# Altium PCB shkb_lite.PcbDoc (part 1 of 2)
Units mm, origin at the board's own origin, x right, y up, seen from the top; angles counter-clockwise.
Board outline 141.5 x 36 mm, 2 copper layers (Top Layer, Bottom Layer), stack 1.57 mm thick; 74 components, 72 nets, 370 pads, 296 vias.
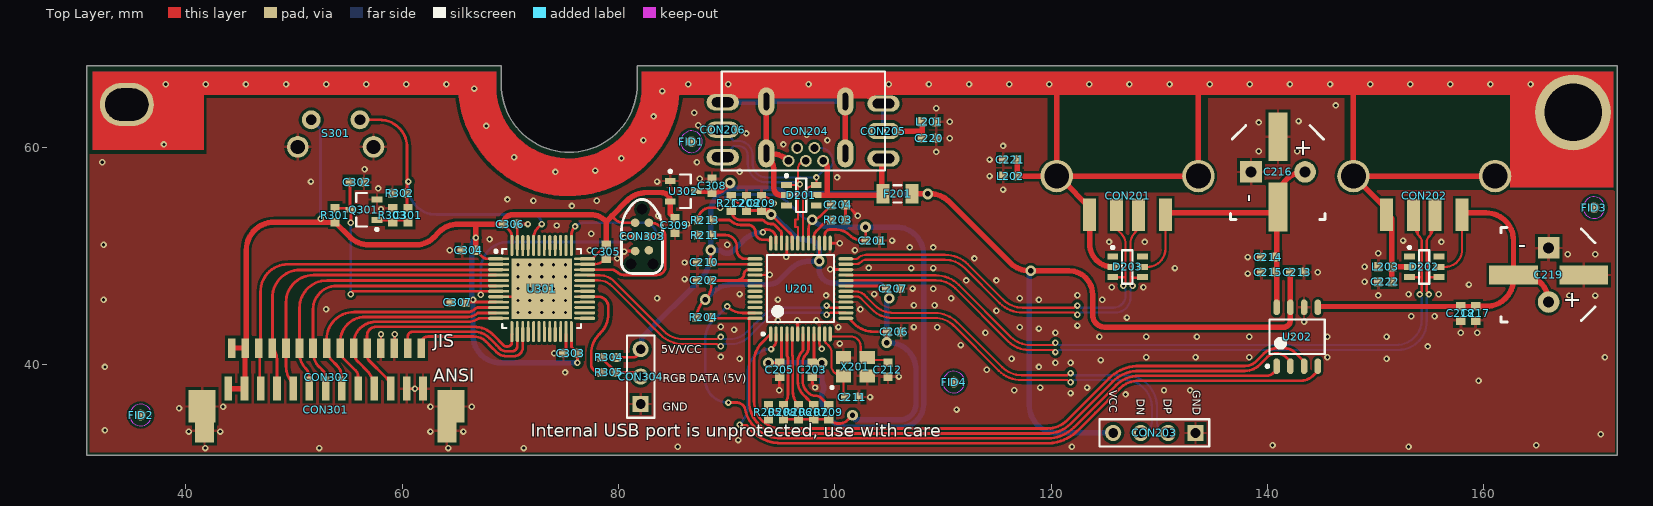
[diagram p0: Top Layer view]
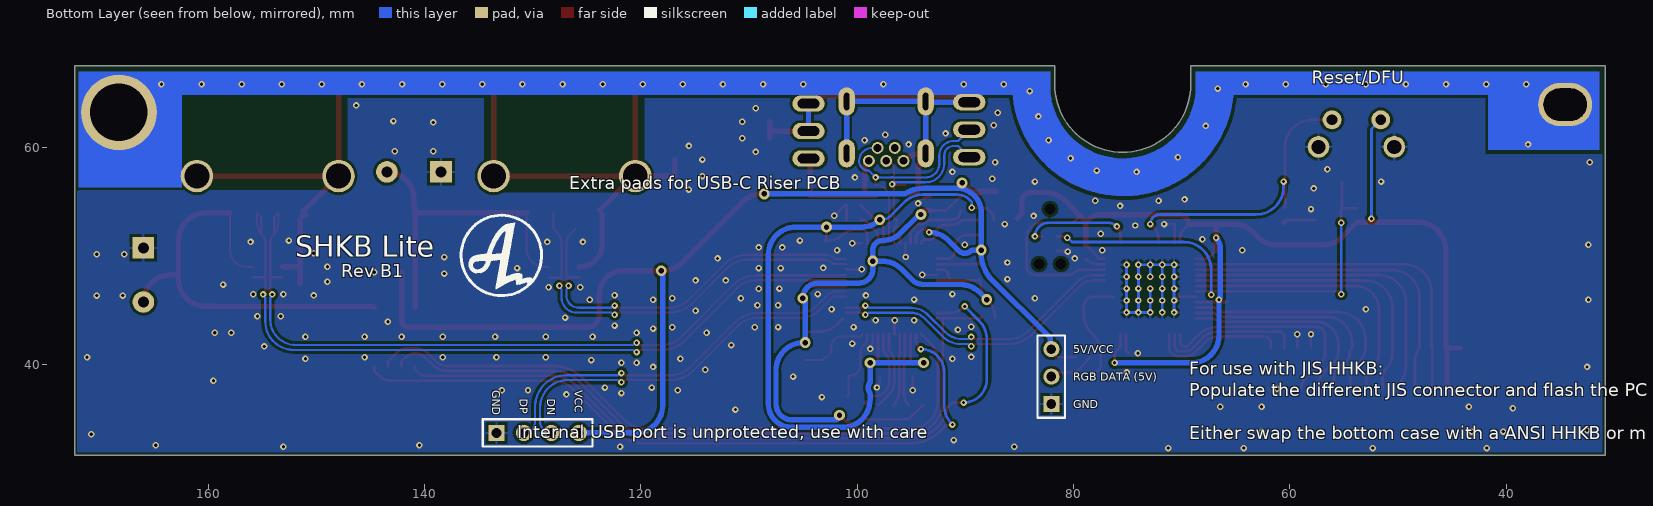
[diagram p1: Bottom Layer view, seen from below]

## Layer stack, top to bottom
Top Solder: solder mask 0.0102, Solder Resist, Dk 3.5
Top Layer: signal copper 0.0356
Dielectric 1: core 1.4986, Core-043, Dk 4.3
Bottom Layer: signal copper 0.0356
Bottom Solder: solder mask 0.0102, Solder Resist, Dk 3.5

## Board outline
30.843,31.602 30.843,67.602 69.143,67.602 69.143,65.902 ccw(c75.443,65.902) 75.443,59.602 ccw(c75.443,65.902) 81.743,65.902 81.743,67.602 172.344,67.602 172.344,31.602

## Design rules (kind name [scope] priority, off if disabled: settings)
BoardOutlineClearance [All] p1: gap=0.254 ignorepadtopadclearanceinfootprint=FALSE except(0: Arc-SplitContinuation Track-SplitContinuation SMDPad-SplitContinuation THPad-SplitContinuation Via-SplitContinuation Fill-SplitContinuation Poly-SplitContinuation Region-SplitContinuation Text-SplitContinuation)
Clearance [All] p1: gap=0.254 ignorepadtopadclearanceinfootprint=FALSE except(0: Arc-Hole Track-Hole SMDPad-Hole THPad-Hole Via-Hole Fill-Hole Poly-Hole Region-Hole Text-Hole; 0.2: Arc-Arc Arc-Track Arc-SMDPad Track-Track Track-SMDPad SMDPad-SMDPad)
DiffPairsRouting [All] p1: maxlimit=0.254 minlimit=0.254 mostfreqgap=0.254 toplayer_minwidth=0.2 toplayer_maxwidth=0.381 toplayer_prefwidth=0.381 bottomlayer_minwidth=0.2 bottomlayer_maxwidth=0.381 bottomlayer_prefwidth=0.381 maxuncoupledlength=12.7
PlaneConnect [All] p1: pad.planeconnectstyle=Relief pad.reliefexpansion=0.508 pad.reliefentries=4 pad.reliefconductorwidth=0.254 pad.reliefairgap=0.254 via.planeconnectstyle=Direct via.reliefexpansion=0.508 via.reliefentries=4 via.reliefconductorwidth=0.254 via.reliefairgap=0.254
PolygonConnect [All] p1: connectstyle=Relief reliefconductorwidth=0.254 reliefentries=4 polygonreliefangle="90 Angle" airgapwidth=0.254
RoutingVias [All] p1: holewidth=0.711 width=1.27 viastyle="Through Hole" minholewidth=0.3 minwidth=0.6 maxholewidth=0.711 maxwidth=1.27
SolderMaskExpansion [All] p1: expansion=0.102 istentingtop=FALSE
Width [All] p1: maxlimit=0.5 minlimit=0.2 preferedwidth=0.254
28 further rules are at their usual default settings.

## Classes and differential pairs
component class Designator: C301 C302 C303 C304 C305 C306 C307 C308 C309 CON301 CON302 CON303 CON304 Q301 R301 R302 R303 R304 R305 S301 U301 U302
differential pair D: +D_P -D_N
differential pair D4: +D4_P -D4_N
differential pair D3: +D3_P -D3_N
differential pair D2: +D2_P -D2_N
differential pair D1: +D1_P -D1_N

## Components (designator, comment, footprint, x,y, rotation, side; value= is the part's Value field where it differs from the comment)
C201 "" C0603[1608] 103.505,51.443 r180 top value=10uF
C202 "" C0603[1608] 87.925,47.76 r0 top value=10uF
C203 "" C0603[1608] 97.917,39.505 r90 top value=0.1uF
C204 "" C0603[1608] 100.33,54.745 r180 top value=0.1uF
C205 "" C0603[1608] 94.91,39.505 r90 top value=0.1uF
C206 "" C0603[1608] 105.48,43.017 r180 top value=0.1uF
C207 "" C0603[1608] 105.41,46.998 r180 top value=0.1uF
C208 "" C0603[1608] 91.821,54.872 r270 top value=0.1uF
C209 "" C0603[1608] 93.218,54.872 r270 top value=0.1uF
C210 "" C0603[1608] 87.925,49.411 r0 top value=1uF
C211 "" C0603[1608] 101.6,36.965 r180 top value=30pF
C212 "" C0603[1608] 104.902,39.505 r90 top value=30pF
C213 "" C0603[1608] 142.748,48.514 r180 top value=0.1uF
C214 "" C0603[1608] 140.081,49.911 r0 top value=0.1uF
C215 "" C0603[1608] 140.081,48.514 r0 top value=10uF
C216 "" "C_9L_9M + THT" 140.97,57.785 r270 top value=100-150uF
C217 "" C0603[1608] 159.258,44.704 r90 top value=0.1uF
C218 "" C0603[1608] 157.861,44.704 r90 top value=10uF
C219 "" "C_9L_9M + THT" 165.989,48.26 r180 top value=100-150uF
C220 "" C0603[1608] 108.712,60.893 r180 top value=0.1uF
C221 "" C0603[1608] 116.205,58.928 r0 top value=0.1uF
C222 "" C0603[1608] 150.876,47.625 r0 top value=0.1uF
C301 "" C0603[1608] 60.522,53.782 r270 top value=4.7uF
C302 "" C0603[1608] 55.823,56.83 r0 top value=470nF
C303 "" C0603[1608] 75.565,41.021 r0 top value=0.1uF
C304 "" C0603[1608] 66.167,50.546 r0 top value=0.1uF
C305 "" C0603[1608] 78.867,50.404 r90 top value=0.1uF
C306 "" C0603[1608] 69.977,52.959 r180 top value=0.1uF
C307 "" C0603[1608] 65.151,45.72 r0 top value=0.1uF
C308 "" C0603[1608] 88.646,56.515 r270 top value=1uF
C309 "" C0603[1608] 85.217,52.832 r90 top value=1uF
CON201 "Generic USB-A 2.0" "JING 903-231A2031S10100" 127.058,57.4 r180 top locked
CON202 "Generic USB-A 2.0" "JING 903-231A2031S10100" 154.493,57.4 r180 top locked
CON203 "Header 4" HDR1X4 125.73,33.655 r0 top
CON204 "HRO U-M-M5DD-W-2" "HRO U-M-M5DD-W-2" 97.315,59.5 r180 top
CON205 "Header 3" HDR1X3#1 104.492,59.022 r90 top
CON206 "Header 3" HDR1X3#1 89.633,59.149 r90 top
CON301 "HHKB-board connector" "JST S13B-ZR-SM4A-TF(LF)(SN)" 61.922,37.749 r180 top locked
CON302 "HHKB-board connector JP" DF14A-15P-1.25H 53.005,36.102 r180 top locked
CON303 "TC2030-IDC" TC2030-IDC-NL 82.169,51.816 r270 top
CON304 "Header 3" HDR1X3#2 82.042,36.322 r90 top
D201 "SRV05" SOT-23-6 96.901,55.634 r180 top locked
D202 "SRV05" SOT-23-6 154.493,49 r180 top
D203 "SRV05" SOT-23-6 127.058,49 r180 top
F201 "Fuse Thermal" C1206[3216] 105.791,55.753 r180 top
FID1 "Plug" Fiducial_Nordic 86.741,60.579 r90 top
FID2 "Plug" Fiducial_Nordic 35.814,35.306 r90 top
FID3 "Plug" Fiducial_Nordic 170.18,54.483 r90 top
FID4 "Plug" Fiducial_Nordic 110.998,38.354 r90 top
L201 "Inductor" L0603[1608] 108.712,62.417 r180 top value="220 @ 100MHz, 2A"
L202 "Inductor" L0603[1608] 116.205,57.404 r0 top value="220 @ 100MHz, 2A"
L203 "Inductor" L0603[1608] 150.876,49.022 r0 top value="220 @ 100MHz, 2A"
Q301 "2N7002 NMOS" SOT-23-3 56.458,54.29 r0 top
R203 "" R0603[1608] 100.33,53.348 r180 top value=2.7k
R204 "" R0603[1608] 87.884,44.331 r180 top value=10k
R205 "" R0603[1608] 93.853,35.568 r90 top value=10k
R206 "" R0603[1608] 96.647,35.568 r270 top value=10k
R207 "" R0603[1608] 98.044,35.568 r270 top value=10k
R208 "" R0603[1608] 95.25,35.568 r270 top value=10k
R209 "" R0603[1608] 99.441,35.568 r270 top value=10k
R211 "" R0603[1608] 88.011,51.951 r0 top value=10k
R212 "" R0603[1608] 90.424,54.872 r90 top value=10k
R213 "" R0603[1608] 88.011,53.34 r0 top value=10k
R301 "Res1" R0603[1608] 53.791,53.782 r90 top value=10K
R302 "Res1" R0603[1608] 59.76,55.814 r180 top value=10K
R303 "Res1" R0603[1608] 59.125,53.782 r90 top value=100K
R304 "Res1" R0603[1608] 79.121,40.64 r180 top value=10K
R305 "Res1" R0603[1608] 79.121,39.243 r180 top value=470
S301 "SW-PB" "WURTH 431256038736" 53.843,62.602 r180 top locked
U201 "FE1.1" "FE1.1 LQFP48" 96.815,46.998 r0 top
U202 "MIC2026-2" SOIC-8 142.748,42.545 r0 top
U301 "STM32F072/F303_LQFP48" "STM32 - COMBO 7X7MM" 72.894,46.998 r270 top locked
U302 "XC6206P332MR" SOT-23-3 85.979,56.007 r180 top
X201 "XTAL" XTAL-3225 101.895,39.759 r0 top value=12MHz

## Footprints (in the part's own frame and the unit in brackets; to place one, negate y for a bottom-side part, rotate by r counter-clockwise, add the part's x,y. Pads: shape width x height; smd on the part's side, far side on the other; paste and mask are expansions set on the pad)
C0603[1608] [mm] "Chip Resistor, 2-Leads, Body 1,57x0,80mm, IPC Medium Density"
  rect 0.8x0.85 smd: 1(-0.65,0) 2(0.65,0)
  body extent -0.83,-0.43 0.82,0.43, height 0.5
C1206[3216] [mm]
  rect 1.2x1.8 smd: 1(-1.35,0) 2(1.35,0)
  silkscreen extent -0.35,-0.8 0.35,0.8, body extent -1.6,-0.9 1.6,0.9, height 1.2
"C_9L_9M + THT" [mm] "Size 9L and 9M Aluminium capacitor"
  round 2 hole 1 mask+0.102: 1(0,2.5)
  rect 4.5x1.75 smd: 1(3.25,0) 2(-3.25,0)
  rect 2x2 hole 1 mask+0.102: 2(0,-2.5)
  silkscreen extent -4.29,-4.39 4.39,4.34, body extent -4.8,-4.26 4.8,4.24, height 6.5
DF14A-15P-1.25H [mm]
  rect 0.7x1.8 smd: 1(8.75,-5.4) 2(7.5,-5.4) 3(6.25,-5.4) 4(5,-5.4) 5(3.75,-5.4) 6(2.5,-5.4) 7(1.25,-5.4) 8(0,-5.4) 9(-1.25,-5.4) 10(-2.5,-5.4) 11(-3.75,-5.4) 12(-5,-5.4) 13(-6.25,-5.4) 14(-7.5,-5.4) 15(-8.75,-5.4)
  rect 2.5x3 smd: 16(-11.5,0) 16(11.5,0)
"FE1.1 LQFP48" [mm] "TSQFP, 48-Leads, Body 7.00x7.00mm, Pitch 0.50mm, IPC Medium Density"
  oval 0.3x1.4 smd: 1(-2.75,-4.2) 2(-2.25,-4.2) 3(-1.75,-4.2) 4(-1.25,-4.2) 5(-0.75,-4.2) 6(-0.25,-4.2) 7(0.25,-4.2) 8(0.75,-4.2) 9(1.25,-4.2) 10(1.75,-4.2) 11(2.25,-4.2) 12(2.75,-4.2) 25(2.75,4.2) 26(2.25,4.2) 27(1.75,4.2) 28(1.25,4.2) 29(0.75,4.2) 30(0.25,4.2) 31(-0.25,4.2) 32(-0.75,4.2) 33(-1.25,4.2) 34(-1.75,4.2) 35(-2.25,4.2) 36(-2.75,4.2)
  oval 1.4x0.3 smd: 13(4.2,-2.75) 14(4.2,-2.25) 15(4.2,-1.75) 16(4.2,-1.25) 17(4.2,-0.75) 18(4.2,-0.25) 19(4.2,0.25) 20(4.2,0.75) 21(4.2,1.25) 22(4.2,1.75) 23(4.2,2.25) 24(4.2,2.75) 37(-4.2,2.75) 38(-4.2,2.25) 39(-4.2,1.75) 40(-4.2,1.25) 41(-4.2,0.75) 42(-4.2,0.25) 43(-4.2,-0.25) 44(-4.2,-0.75) 45(-4.2,-1.25) 46(-4.2,-1.75) 47(-4.2,-2.25) 48(-4.2,-2.75)
  silkscreen extent -3.57,-4.32 3.1,3.1, body extent -4.5,-4.5 4.5,4.5, height 1.5
Fiducial_Nordic [mm]
  round 1 smd paste+0 mask+0.5: 0(0,0)
  Top Layer keep-out circle w0.01: c0,0 r1
HDR1X3#1 [mm] "Connector; Header; 3 Position"
  oval 1.5x3 hole 0.9 slot 2 at 90 deg: 1(0,0) 2(2.54,0) 3(5.08,0)
HDR1X3#2 [mm] "Connector; Header; 3 Position"
  rect 1.5x1.5 hole 0.9: 1(0,0)
  round 1.5 hole 0.9: 2(2.54,0) 3(5.08,0)
  silkscreen extent -1.27,-1.27 6.35,1.27
HDR1X4 [mm] "Connector; Header; 4 Position"
  round 1.5 hole 0.9: 1(0,0) 2(2.54,0) 3(5.08,0)
  rect 1.5x1.5 hole 0.9: 4(7.62,0)
  silkscreen extent -1.27,-1.27 8.89,1.27
"HRO U-M-M5DD-W-2" [mm]
  round 1.1 hole 0.7: 1(-1.6,0.7) 2(-0.8,-0.5) 3(0,0.7) 4(0.8,-0.5) 5(1.6,0.7)
  oval 1.5x2.6 hole 0.5 slot 1.6 at 90 deg: S(-3.65,0) S(-3.65,-4.8) S(3.65,0) S(3.65,-4.8)
"JING 903-231A2031S10100" [mm] "C42646"
  rect 1.2x3 smd: 1(-3.5,3.592) 2(-1,3.592) 3(1,3.592) 4(3.5,3.592)
  round 3 hole 2.3: 5(-6.55,0) 5(6.55,0)
"JST S13B-ZR-SM4A-TF(LF)(SN)" [mm]
  rect 0.7x2.2 smd: 1(0,0) 2(1.5,0) 3(3,0) 4(4.5,0) 5(6,0) 6(7.5,0) 7(9,0) 8(10.5,0) 9(12,0) 10(13.5,0) 11(15,0) 12(16.5,0) 13(18,0)
  rect 1.75x2.2 smd: 14(-2.2,3.9) 14(20.2,3.9)
  body extent -2.23,-0.53 20.27,5.97, height 3.7
L0603[1608] [mm] "Chip Resistor, 2-Leads, Body 1,57x0,80mm, IPC Medium Density"
  rect 0.8x0.85 smd: 1(-0.65,0) 2(0.65,0)
  body extent -0.83,-0.43 0.82,0.43, height 0.5
R0603[1608] [mm] "Chip Resistor, 2-Leads, Body 1,57x0,80mm, IPC Medium Density"
  rect 0.8x0.85 smd: 1(-0.65,0) 2(0.65,0)
  body extent -0.83,-0.43 0.82,0.43, height 0.5
SOIC-8 [mm] "Based on AT24C256C datasheet"
  oval 0.6x1.45 smd: 1(-1.905,-2.725) 2(-0.635,-2.725) 3(0.635,-2.725) 4(1.905,-2.725) 5(1.905,2.725) 6(0.635,2.725) 7(-0.635,2.725) 8(-1.905,2.725)
  silkscreen extent -2.88,-2.85 2.55,1.6, body extent -2.55,-3 2.55,3, height 1.75
SOT-23-3 [mm] "3.3v regulator, used in Windsond S2 proto 1"
  rect 1x0.55 smd: 1(1.2,-0.95) 2(1.2,0.95) 3(-1.2,0)
  silkscreen extent -0.7,-1.95 1.33,1.55, body extent -1.1,-1.5 1.45,1.5, height 1
SOT-23-6 [mm]
  rect 1x0.55 smd: 1(1.375,-0.95) 2(1.375,0) 3(1.375,0.95) 4(-1.375,0.95) 5(-1.375,0) 6(-1.375,-0.95)
  silkscreen extent -0.46,-1.92 1.5,1.55, body extent -1.47,-1.49 1.37,1.44, height 1.05
"STM32 - COMBO 7X7MM" [mm] "LQFP48, 7x7mm"
  oval 0.3x1.45 smd paste-5: 1(-2.75,-4.225) 2(-2.25,-4.225) 3(-1.75,-4.225) 4(-1.25,-4.225) 5(-0.75,-4.225) 6(-0.25,-4.225) 7(0.25,-4.225) 8(0.75,-4.225) 9(1.25,-4.225) 10(1.75,-4.225) 11(2.25,-4.225) 12(2.75,-4.225) 25(2.75,4.225) 26(2.25,4.225) 27(1.75,4.225) 28(1.25,4.225) 29(0.75,4.225) 30(0.25,4.225) 31(-0.25,4.225) 32(-0.75,4.225) 33(-1.25,4.225) 34(-1.75,4.225) 35(-2.25,4.225) 36(-2.75,4.225)
  oval 0.25x0.8 smd: 1(-2.75,-3.4) 2(-2.25,-3.4) 3(-1.75,-3.4) 4(-1.25,-3.4) 5(-0.75,-3.4) 6(-0.25,-3.4) 7(0.25,-3.4) 8(0.75,-3.4) 9(1.25,-3.4) 10(1.75,-3.4) 11(2.25,-3.4) 12(2.75,-3.4) 25(2.75,3.4) 26(2.25,3.4) 27(1.75,3.4) 28(1.25,3.4) 29(0.75,3.4) 30(0.25,3.4) 31(-0.25,3.4) 32(-0.75,3.4) 33(-1.25,3.4) 34(-1.75,3.4) 35(-2.25,3.4) 36(-2.75,3.4)
  oval 0.8x0.25 smd: 13(3.4,-2.75) 14(3.4,-2.25) 15(3.4,-1.75) 16(3.4,-1.25) 17(3.4,-0.75) 18(3.4,-0.25) 19(3.4,0.25) 20(3.4,0.75) 21(3.4,1.25) 22(3.4,1.75) 23(3.4,2.25) 24(3.4,2.75) 37(-3.4,2.75) 38(-3.4,2.25) 39(-3.4,1.75) 40(-3.4,1.25) 41(-3.4,0.75) 42(-3.4,0.25) 43(-3.4,-0.25) 44(-3.4,-0.75) 45(-3.4,-1.25) 46(-3.4,-1.75) 47(-3.4,-2.25) 48(-3.4,-2.75)
  oval 1.45x0.3 smd paste-5: 13(4.225,-2.75) 14(4.225,-2.25) 15(4.225,-1.75) 16(4.225,-1.25) 17(4.225,-0.75) 18(4.225,-0.25) 19(4.225,0.25) 20(4.225,0.75) 21(4.225,1.25) 22(4.225,1.75) 23(4.225,2.25) 24(4.225,2.75) 37(-4.225,2.75) 38(-4.225,2.25) 39(-4.225,1.75) 40(-4.225,1.25) 41(-4.225,0.75) 42(-4.225,0.25) 43(-4.225,-0.25) 44(-4.225,-0.75) 45(-4.225,-1.25) 46(-4.225,-1.75) 47(-4.225,-2.25) 48(-4.225,-2.75)
  rect 5.6x5.6 smd: 47(0,0)
  silkscreen extent -3.65,-4.35 3.65,3.65, body extent -4.5,-4.5 4.5,4.5, height 1.5
TC2030-IDC-NL [mm] "Tag-Connect 6-Pin with No Legs (PN# TC2030-IDC-NL)"
  round 0.9 hole 0.995 unplated: 0(-2.54,0) 0(2.54,1.016) 0(2.54,-1.016)
  round 0.79 smd paste-0.39: 1(-1.27,-0.635) 2(-1.27,0.635) 3(0,-0.635) 4(0,0.635) 5(1.35,-0.635) 6(1.27,0.635)
  silkscreen extent -3.43,-1.9 3.43,1.9
"WURTH 431256038736" [mm]
  round 1.75 hole 1 mask+0.102: 1(-2.25,0) 2(2.25,0)
  round 2 hole 1.3 mask+0.102: 3(-3.5,2.5) 3(3.5,2.5)
  body extent -4.2,-3.85 4.2,4, height 7.2
XTAL-3225 [mm]
  rect 1.4x1.2 smd: 1(-1.1,-0.85) 2(1.1,-0.85) 3(1.1,0.85) 4(-1.1,0.85)
  silkscreen extent -2.28,-2.03 -2.03,-1.78, body extent -1.6,-1.25 1.6,1.25, height 0.65

## Part data
C201 C202 C215 C218: library part Cap, "Capacitor", JLC=BASIC, LCSC MFG="Samsung Electro-Mechanics", LCSC Part #=C19702, MRF.Part=CL10A106KP8NNNC, Version="0603 imperial"
C203 C204 C205 C206 C207 C208 C209 C213 C214 C217 C220 C221 C222: library part Cap, "Capacitor", JLC=BASIC, LCSC MFG=YAGEO, LCSC Part #=C14663, MFG=KEMET, MFGPN=C0603C104M5RACTU, MRF.Part=CC0603KRX7R9BB104, Version="0603 imperial"
C210: library part Cap, "Capacitor", JLC=BASIC, LCSC MFG="Samsung Electro-Mechanics", LCSC Part #=C15849, MFG=KEMET, MFGPN=C0603C105K4RACTU, MRF.Part=CL10A105KB8NNNC, Version="0603 imperial"
C211 C212: library part Cap, "Capacitor", JLC=BASIC, LCSC MFG="FH (Guangdong Fenghua Advanced Tech)", LCSC Part #=C1658, MRF.Part=0603CG300J500NT, Version="0603 imperial"
C216 C219: library part Cap, "Capacitor", JLC=EXTENDED, LCSC MFG=Lelon, LCSC Part #=C134878, MRF.Part=OVZ101M1CTR-0606, Version="SMD - 9L or 9M"
C301: library part Cap, "Capacitor", LCSC MFG="Samsung Electro-Mechanics", LCSC Part #=C19666, MRF.Part=CL10A475KO8NNNC, Version="0603 imperial"
C302: library part Cap, "Capacitor", LCSC MFG="Samsung Electro-Mechanics", LCSC Part #=C1623, MRF.Part=CL10B474KA8NNNC, Version="0603 imperial"
C303 C304 C305 C306 C307: library part Cap, "Capacitor", LCSC MFG=YAGEO, LCSC Part #=C14663, MRF.Part=CC0603KRX7R9BB104, Version="0603 imperial"
C308 C309: library part Cap, "Capacitor", LCSC MFG="Samsung Electro-Mechanics", LCSC Part #=C15849, MRF.Part=CL10A105KB8NNNC, Version="0603 imperial"
CON201 CON202: JLC=EXTENDED, LCSC MFG="Jing Extension of the Electronic Co.", LCSC Part #=C42646, MRF.Part=903-231A2031S10100
CON203: "Header, 4-Pin"
CON204: LCSC MFG="Korean Hroparts Elec", LCSC Part #=C879746, MRF.Part=U-M-M5DD-W-2
CON205 CON206 CON304: "Header, 3-Pin"
  CON304: LatestRevisionDate=17-Jul-2002, LatestRevisionNote="Re-released for DXP Platform.", Publisher="Altium Limited"
CON301: library part "Header 14", JLC=NONE, LCSC MFG="JST Sales America", LCSC Part #=C265326, MFG="JST Sales America Inc", MFGPN=S13B-ZR-SM4A-TF(LF)(SN), MRF.Part=S13B-ZR-SM4A-TF(LF)(SN)
CON302: library part DF14A-15P-1.25H, JLC=NONE, LCSC MFG=HRS(Hirose), LCSC Part #=C597889, MFG="Hirose Electric Co Ltd", MFGPN=DF14A-15P-1.25H(26), MRF.Part=DF14A-15P-1.25H(26)
CON303: library part "Header 3X2", "Header, 3-Pin, Dual row"
D201 D202 D203: JLC=BASIC, LCSC MFG="ProTek Devices", LCSC Part #=C85364, MRF.Part=SRV05-4-P-T7
F201: "Thermal Fuse", LCSC MFG="Shenzhen JDT Fuse", LCSC Part #=C135338, MFG="Bel Fuse Inc.", MFGPN=0ZCJ0050FF2G, MRF.Part=ASMD1206-050
FID1 FID2 FID3 FID4: JLC=DNP
L201 L202 L203: JLC=EXTENDED, LCSC MFG="Murata Electronics", LCSC Part #=C85832, MFG="Murata Electronics North America", MFGPN=BLM18KG221SN1D, MRF.Part=BLM18KG331SN1D, Version="0603 imperial"
Q301: library part MOSFET-N, "N-Channel MOSFET", LCSC MFG="Changjiang Electronics Tech (CJ)", LCSC Part #=C8545, MRF.Part=2N7002
R203: library part Res1, "Resistor", JLC=BASIC, LCSC MFG="UNI-ROYAL(Uniroyal Elec)", LCSC Part #=C13167, MRF.Part=0603WAF2701T5E, Version="0603 imperial"
R204 R205 R206 R207 R208 R209 R211 R212 R213: library part Res1, "Resistor", JLC=BASIC, LCSC MFG="Uniroyal Elec", LCSC Part #=C25804, MFG="Vishay Dale", MFGPN=RCA060310K0FKEA, MRF.Part=0603WAF1002T5E, Version="0603 imperial"
R301 R302 R304: "Resistor", LCSC MFG="Uniroyal Elec", LCSC Part #=C25804, MRF.Part=0603WAF1002T5E, Version="0603 imperial"
R303: "Resistor", LCSC MFG="Uniroyal Elec", LCSC Part #=C25803, MRF.Part=0603WAF1003T5E, Version="0603 imperial"
R305: "Resistor", LCSC MFG="UNI-ROYAL(Uniroyal Elec)", LCSC Part #=C23179, MRF.Part=0603WAF4700T5E, Version="0603 imperial"
S301: "Switch", JLC=NONE, LCSC MFG="Korean Hroparts Elec", LCSC Part #=C127680, MFG="Wurth Electronics Inc", MFGPN=431256038736, MRF.Part=K2-1102AQ-C4CW-01
U201: JLC=EXTENDED, LCSC MFG="Terminus Tech", LCSC Part #=C28958, MRF.Part=FE1.1
U202: JLC=EXTENDED, LCSC MFG="Microchip Tech", LCSC Part #=C148072, MRF.Part=MIC2026-2YM-TR
U301: LCSC MFG=Geehy, LCSC Part #=C915660, MRF.Part=APM32F072CBT6
U302: library part "SOT23 LDO", LCSC MFG="Torex Semicon", LCSC Part #=C5446, MRF.Part=XC6206P332MR
X201: "Crystal Oscillator", JLC=BASIC, LCSC MFG="Yangxing Tech", LCSC Part #=C9002, MRF.Part=X322512MSB4SI

## Free pads (board coordinates)
  oval 5x4 hole 3 slot 4 at 0 deg paste-1: ""(34.544,64.008)
  round 7 hole 5.3: ""(168.251,63.288)

## Via types
v1: diameter 0.6, hole 0.3, Top Layer to Bottom Layer, tented both sides, 257 vias
v2: diameter 0.6, hole 0.3, Top Layer to Bottom Layer, tented bottom, 25 vias
v3: diameter 1, hole 0.5, Top Layer to Bottom Layer, tented both sides, 14 vias

## Nets (pads, with @x,y where several pads share a name; then routed paths per layer and width w, separated by ;. In a path a pad name is that pad's centre, name@x,y a point inside that pad or via, vN(x,y) a via of type N, cw(c..) or ccw(c..) an arc to the next point about the centre after c; other vN are vias at no path point)
BOOT0: C301.1 R302.1 S301.1 U301.44 | length 28.2
  Top Layer w0.254: S301.1@56.093,62.602 57.912,62.602 cw(c57.912,60.062) 58.497,62.534 cw(c57.912,60.062) 60.384,60.647 cw(c57.912,60.062) 60.452,60.062 60.452,54.502 C301.1@60.522,54.432 ; U301.44@72.144,51.223 72.144,51.672 cw(c73.431,51.672) 72.521,52.582 v1(72.898,52.959)
  Bottom Layer w0.254: v1(60.579,56.896) 60.579,56.388 ccw(c63.119,56.388) 63.119,53.848 72.009,53.848 cw(c72.009,52.959) v1(72.898,52.959)
D1_N: CON201.2 D203.4 U201.23 | length 38.6
  Top Layer w0.203: U201.23@101.015,49.248 cw(c101.06,49.203) 101.06,49.267 101.652,49.267 101.655,49.269 101.952,49.269 ccw(c101.952,49.945) 102.43,49.467 cw(c102.907,48.99) 102.907,49.665 110.18,49.665 cw(c110.18,47.125) 111.976,48.921 115.245,45.653 ccw(c117.363,47.771) 115.248,45.65 ccw(c117.363,47.771) 117.359,44.775 ccw(c117.363,47.771) 117.363,44.775 122.122,44.775 122.321,44.577 v1(122.428,44.577) ; v1(127.529,47.251) cw(c127.529,47.45) 127.33,47.45 127.33,48.006 ; CON201.2@128.058,54 128.058,52.5 127.784,52.226 ccw(c128.874,51.133) 127.33,51.133 127.33,51.13 127.33,48.006 ; D203.4@128.433,48.05 cw(c128.389,48.05) 128.389,48.006 127.33,48.006
  Bottom Layer w0.203: v1(122.428,44.577) 122.535,44.577 122.734,44.775 125.94,44.775 ccw(c125.94,46.166) 127.33,46.166 127.33,46.946 127.529,47.144 v1(127.529,47.251)
D1_P: CON201.3 D203.3 U201.24 | length 36.4
  Top Layer w0.203: U201.24@101.015,49.748 ccw(c101.06,49.793) 101.06,49.729 101.652,49.729 101.655,49.727 101.95,49.727 ccw(c101.95,49.95) 102.108,49.792 ; 102.109,49.793 cw(c102.905,48.994) 102.905,50.122 110.182,50.122 cw(c110.182,47.128) 112.299,49.245 115.567,45.977 ccw(c117.364,47.773) 117.364,45.233 122.122,45.233 122.321,45.431 v1(122.428,45.431) ; D203.3@125.683,48.05 126.829,48.05 cw(c126.829,48.006) 126.873,48.006 ; CON201.3@126.058,52.5 126.477,52.081 126.478,52.08 cw(c125.529,51.128) 126.873,51.128 126.873,48.006 ; v1(126.675,47.251) ccw(c126.675,47.45) 126.873,47.45 126.873,48.006
  Bottom Layer w0.203: v1(122.428,45.431) 122.535,45.431 122.734,45.233 125.751,45.233 ccw(c125.751,46.355) 126.873,46.355 126.873,46.946 126.675,47.144 v1(126.675,47.251)
D2_N: CON202.2 D202.4 U201.20 | length 71.6
  Top Layer w0.203: U201.20@101.015,47.748 101.034,47.767 101.652,47.767 101.655,47.769 109.332,47.769 cw(c109.332,45.229) 111.128,47.025 116.04,42.113 ; 116.041,42.112 ccw(c117.94,44.012) 117.94,41.326 120.198,41.326 v1(120.396,41.127) ; v1(154.92,46.454) 154.92,46.561 154.722,46.759 154.722,48.006 ; D202.4@155.868,48.05 154.766,48.05 ccw(c154.766,48.006) 154.722,48.006 ; 154.722,48.006 154.722,51.334 cw(c155.358,51.334) 154.908,51.784 ; 154.908,51.784 ccw(c153.496,53.196) 154.909,51.785 ; 154.908,51.784 154.909,51.785 ; 154.909,51.785 ccw(c153.496,53.196) 155.095,51.999 ; 155.095,51.999 ccw(c153.496,53.196) 155.493,53.196 155.493,54 155.095,53.602 155.095,51.999
  Bottom Layer w0.203: v1(120.396,41.127) 120.503,41.127 120.702,41.326 152.081,41.326 ccw(c152.081,43.966) 154.722,43.966 154.722,46.148 154.92,46.346 v1(154.92,46.454)
D2_P: CON202.3 D202.3 U201.21 | length 70.8
  Top Layer w0.203: U201.21@101.015,48.248 101.034,48.229 101.652,48.229 101.655,48.227 109.333,48.227 cw(c109.333,45.233) 111.45,47.35 116.273,42.527 ccw(c118.069,44.323) 118.069,41.783 120.198,41.783 v1(120.396,41.981) ; D202.3@153.118,48.05 154.22,48.05 cw(c154.22,48.006) 154.264,48.006 ; v1(154.066,46.454) 154.066,46.561 154.264,46.759 154.264,48.006 ; 153.891,52.004 ccw(c155.49,53.201) 154.077,51.79 ; 153.891,52.004 cw(c155.49,53.201) 153.493,53.201 153.493,54 153.891,53.602 153.891,52.004 ; 154.077,51.79 ccw(c155.49,53.201) 154.078,51.789 ; 154.077,51.79 154.078,51.789 ; 154.078,51.789 cw(c153.628,51.339) 154.264,51.339 154.264,48.006
  Bottom Layer w0.203: v1(120.396,41.981) 120.503,41.981 120.702,41.783 151.892,41.783 ccw(c151.892,44.155) 154.264,44.155 154.264,46.148 154.066,46.346 v1(154.066,46.454)
D3_N: CON203.2 U201.17 | length 35.9
  Top Layer w0.2: U201.17@101.015,46.248 101.034,46.267 101.655,46.267 101.659,46.271 101.947,46.271 cw(c101.947,45.575) 102.438,46.068 ; 102.439,46.067 103.468,45.038 ccw(c105.264,46.834) 105.264,44.294 109.213,44.294 cw(c109.213,41.754) 111.009,43.55 115.148,39.411 ccw(c117.263,41.527) 115.151,39.408 ccw(c117.263,41.527) 117.259,38.535 ccw(c117.263,41.527) 117.263,38.535 121.485,38.535 121.685,38.335 v1(121.793,38.335)
  Bottom Layer w0.2: v1@121.793,38.535 v1(121.793,38.335) 121.901,38.335 122.101,38.535 126.773,38.535 cw(c126.773,35.995) 129.313,35.995 129.313,34.698 cw(c128.27,34.698) CON203.2@128.27,33.655
D3_P: CON203.3 U201.18 | length 36.5
  Top Layer w0.2: U201.18@101.015,46.748 101.034,46.729 101.655,46.729 101.659,46.725 102.041,46.725 cw(c102.041,46.21) 102.218,46.694 ccw(c102.285,46.882) 102.234,46.689 102.244,46.686 cw(c101.947,45.575) 102.759,46.389 cw(c101.947,45.575) 102.761,46.387 102.955,46.194 103.677,45.471 ; 103.678,45.47 ccw(c105.422,47.216) 105.422,44.748 109.214,44.748 cw(c109.214,41.758) 111.329,43.872 115.468,39.733 ccw(c117.264,41.529) 117.264,38.989 121.485,38.989 121.685,39.189 v1(121.793,39.189)
  Bottom Layer w0.2: v1@121.722,39.189 v1(121.793,39.189) 121.901,39.189 122.101,38.989 126.88,38.989 cw(c126.88,36.102) 129.767,36.102 129.767,34.698 ccw(c130.81,34.698) CON203.3@130.81,33.655
D4_N: U201.14 U301.32 | length 27.4
  Top Layer w0.2: U301.32@77.119,47.748 77.138,47.767 77.784,47.767 77.788,47.771 78.105,47.771 cw(c78.105,45.995) 79.361,47.251 ; 79.361,47.251 83.886,42.726 ccw(c85.944,44.784) 83.887,42.725 ccw(c85.944,44.784) 85.944,41.874 88.966,41.874 cw(c88.966,41.452) 89.264,41.75 ccw(c89.449,41.935) v1(89.449,41.674) ; v1(99.228,44.571) cw(c99.711,44.088) 99.711,44.771 100.371,44.771 100.375,44.767 100.969,44.767 cw(c100.969,44.702) U201.14@101.015,44.748
  Bottom Layer w0.2: v1(89.449,41.674) 89.557,41.674 89.757,41.874 90.449,41.874 ccw(c90.449,44.159) 92.065,42.543 93.762,44.24 cw(c95.044,42.958) 93.763,44.241 cw(c95.044,42.958) 95.044,44.771 98.92,44.771 99.12,44.571 v1(99.228,44.571)
D4_P: U201.15 U301.33 | length 27.4
  Top Layer w0.2: U301.33@77.119,48.248 77.138,48.229 77.784,48.229 77.788,48.225 78.279,48.225 cw(c78.279,46.413) 79.559,47.695 84.183,43.071 ccw(c85.979,44.867) 85.979,42.327 88.966,42.327 ccw(c88.966,42.749) 89.264,42.451 cw(c89.449,42.266) v1(89.449,42.527) ; v1(99.228,45.425) ccw(c99.711,45.908) 99.711,45.225 100.371,45.225 100.375,45.229 100.969,45.229 ccw(c100.969,45.294) U201.15@101.015,45.248
  Bottom Layer w0.2: v1(89.449,42.527) 89.557,42.527 89.757,42.327 90.261,42.327 ccw(c90.261,44.613) 91.877,42.997 93.442,44.562 cw(c95.043,42.961) 93.445,44.565 cw(c95.043,42.961) 95.043,45.225 98.92,45.225 99.12,45.425 v1(99.228,45.425)
D_N: CON204.2 CON206.2 D201.6 U201.30 | length 22.2
  Top Layer w0.2: U201.30@97.042,51.842 97.042,55.35 cw(c98.276,55.35) D201.6@98.276,56.584 98.298,56.606 v1(98.298,57.277)
  Bottom Layer w0.2: CON206.2@89.633,61.689 90.676,60.646 91.059,60.646 cw(c91.059,59.303) 92.402,59.303 92.402,58.547 ccw(c93.672,58.547) 93.672,57.277 96.618,57.277 cw(c96.774,56.642) 96.93,57.277 v1(98.298,57.277) 98.298,57.298 98.896,57.896 ; CON204.2@98.115,60 98.62,60 cw(c98.62,58.801) 99.793,59.049 cw(c98.62,58.801) 99.795,59.039 ; 98.898,57.896 ccw(c98.915,58.8) 99.297,57.98 ccw(c98.915,58.8) 99.794,59.012
D_P: CON204.3 CON206.1 D201.1 U201.31 | length 19.9
  Top Layer w0.2: D201.1@95.526,56.584 96.522,56.584 ccw(c96.522,56.65) v1@96.588,56.65 ; U201.31@96.565,51.198 96.584,51.217 U201.31@96.584,51.838 ; U201.31@96.588,51.842 96.588,52.578 96.588,52.678 96.34,52.678 96.34,53.386 96.588,53.386 96.588,53.848 v1@96.588,56.65 ; v1(96.774,56.642) v1@96.766,56.65 ; CON204.3@97.315,58.8 ccw(c97.315,58.073) 96.588,58.073 96.588,56.828 v1@96.766,56.65 ; v1@96.588,56.65 v1@96.766,56.65
  Bottom Layer w0.2: CON206.1@89.633,59.149 90.676,60.192 91.059,60.192 cw(c91.059,59.303) 91.948,59.303 91.948,58.547 ccw(c93.672,58.547) 93.672,56.823 96.593,56.823 cw(c96.593,56.642) v1(96.774,56.642) ; v1@96.774,56.573 v1@96.843,56.573
GND: C201.1 C202.1 C203.1 C204.1 C205.1 C206.1 C207.1 C208.1 C209.1 C210.1 C211.1 C212.1 C213.1 C214.1 C215.1 C216.2 C217.1 C218.1 C219.2 C220.1 C221.1 C222.1 C302.2 C303.1 C304.1 C305.1 C306.1 C307.1 C308.1 C309.1 CON203.4 CON301.1 CON301.2 CON301.14 CON302.12 CON302.13 CON302.16 CON303.5 CON304.1 L201.1 L202.1 L203.1 Q301.2 R203.1 R211.1 R302.2 R303.2 S301.3 U201.6 U201.10 U201.16 U201.22 U201.25 U201.33 U201.40 U201.42 U202.6 U301.8 U301.23 U301.35 U301.47 U302.1 X201.2 X201.4 | length 54.8
  Top Layer w0.2: U201.40@92.615,48.248 92.625,48.258 93.97,48.258 v1(93.98,48.268) ; v1(95.504,49.919) 95.546,49.961 95.546,51.179 U201.33@95.565,51.198 ; U201.25@99.565,51.198 99.574,51.189 v1(100.457,51.189)
  Top Layer w0.203: CON302.12@58.005,41.502 58.039,41.537 v1(58.039,42.788) ; CON302.13@59.255,41.502 59.309,41.557 v1(59.309,42.788) ; v1@101.9,53.729 v1(102.108,53.729)
  Top Layer w0.254: CON301.2@60.422,37.749 CON301.1@61.922,37.749 ; U301.8@68.669,46.248 70.344,46.248 v2(70.694,45.898) ; U301.47@70.644,51.223 70.644,51.811 70.627,51.828 C306.1@70.627,52.959 v1(71.628,52.959) ; C303.1@74.915,41.021 75.144,41.25 U301.23@75.144,42.773 ; U301.35@77.119,49.248 77.646,49.248 ccw(c77.646,50.975) 78.68,49.592 ccw(c77.646,50.975) C305.1@78.867,49.754 ; v1(80.518,50.419) 80.565,50.466 CON303.5@81.534,50.466 CON303.5@81.51,50.443 ; C209.1@93.218,55.522 cw(c93.218,54.332) 94.06,55.173 v1(94.361,54.872) ; v1(94.869,37.6) 94.869,38.814 C205.1@94.91,38.855 ; v1(96.52,44.077) 96.556,44.041 96.556,42.807 U201.6@96.565,42.798 ; C203.1@97.917,38.855 97.917,38.467 ccw(c98.784,38.467) 98.017,38.062 ccw(c98.784,38.467) v1(98.171,37.854) ; U201.10@98.565,42.798 98.565,41.978 ccw(c99.355,41.978) 98.631,41.662 ccw(c99.355,41.978) v1(98.796,41.42) ; v1(99.568,48.776) 99.587,48.757 101.006,48.757 U201.22@101.015,48.748 ; R203.1@100.98,53.348 C204.1@100.98,54.745 cw(c100.98,54.475) 101.171,54.666 v1(102.108,53.729)
  Bottom Layer w0.254: v2(70.694,44.798) v2(70.694,45.898) v2(70.694,46.998) v2(70.694,48.098) v2(70.694,49.198) v2(71.794,49.198) ; v2(71.794,44.798) v2(71.794,45.898) v2(71.794,46.998) v2(71.794,48.098) v2(71.794,49.198) ; v2(72.894,46.998) v2(72.894,45.898) v2(72.894,44.798) v2(73.994,44.798) ; v2(72.894,48.098) v2(72.894,49.198) ; v2(75.094,49.198) v2(75.094,48.098) v2(75.094,46.998) v2(75.094,45.898) v2(75.094,44.798) v2(73.994,44.798) ; v2(71.794,49.198) v2(72.894,49.198) ; v2(72.894,49.198) v2(73.994,49.198) v2(73.994,48.098) v2(73.994,46.998) v2(73.994,45.898) v2(73.994,44.798)
  other v1: 41.783,32.258 52.324,32.258 64.262,32.258 71.247,32.258 85.471,32.385 121.92,32.385 153.035,32.385 140.462,32.512 164.846,32.512 91.059,33 170.815,33.528 40.259,33.782 43.18,33.782 62.611,33.782 65.659,33.782 32.512,33.909 111.252,35.814 39.37,35.941 43.434,36.068 62.611,36.068 66.421,36.068 103.251,36.965 126.873,37.211 121.793,37.34 116.586,37.592 130.429,37.592 132.842,37.592 61.172,37.749 118.999,37.846 123.317,37.846 159.512,38.481 105.918,38.87 75.057,39.243 114.046,39.497 32.512,39.751 118.872,39.751 120.396,40.132 121.793,40.134 124.587,40.386 91.186,40.521 116.332,40.513 151.003,40.513 128.778,40.64 133.35,40.64 138.303,40.64 145.542,40.64 171.196,40.64 89.449,40.678 74.041,41.021 154.813,41.656 111.633,41.783 100.457,41.918 124.46,42.545 128.778,42.545 133.477,42.545 138.303,42.545 142.113,42.545 145.542,42.545 151.003,42.545 113.919,42.926 120.396,42.926 157.861,42.926 159.385,42.926 90.678,43.188 118.872,43.307 100.33,43.442 107.315,43.442 109.474,43.434 117.094,43.434 89.449,43.472 122.428,43.582 143.383,43.942 94.742,44.077 98.298,44.077 127,44.323 153.289,44.45 155.448,44.45 114.935,44.958 52.959,45.085 102.362,45.093 107.315,45.466 109.22,45.466 32.385,45.974 94.742,45.982 118.872,45.974 124.714,45.974 83.566,46.101 110.744,46.101 117.094,46.101 99.187,46.363 167.894,46.355 170.307,46.355 122.428,46.376 150.226,46.37 91.186,46.49 103.632,46.49 153.035,46.482 155.829,46.482 107.188,46.998 109.093,46.99 125.603,47.117 128.524,47.117 158.623,47.371 148.971,47.625 112.141,47.752 114.935,47.752 86.106,47.879 138.176,48.387 144.653,48.514 103.124,48.903 107.061,48.895 109.093,48.895 131.445,48.895 148.971,49.022 86.106,49.411 79.883,49.784 112.903,49.784 138.176,49.911 167.767,50.165 170.307,50.165 150.226,50.277 64.389,50.546 77.343,50.546 101.854,50.554 106.934,50.8 109.093,50.8 32.385,51.054 90.043,51.062 125.349,51.308 128.651,51.308 156.083,51.308 105.283,51.443 152.527,51.435 68.072,51.562 77.47,52.07 74.295,52.832 86.36,52.967 83.693,53.721 58.039,54.356 75.692,54.638 72.136,55.118 77.978,55.118 69.723,55.245 115.555,56.149 57.785,56.261 51.562,56.896 83.566,56.896 87.503,57.15 100.203,57.277 114.3,57.404 91.186,57.785 56.515,58.039 32.258,58.674 87.249,58.674 114.3,58.928 109.362,59.638 139.192,59.69 142.748,59.69 115.555,60.183 95.25,60.325 99.314,60.706 110.617,60.893 97.409,61.214 91.821,61.341 87.376,62.103 139.192,62.357 110.617,62.417 142.875,62.484 86.995,63.246 109.362,63.672 146.312,63.937
LED: R305.2 U301.29 | length 10.5
  Top Layer w0.254: U301.29@76.294,46.248 78.105,46.248 cw(c78.105,45.296) 78.612,46.102 cw(c78.105,45.296) 78.911,45.803 cw(c78.105,45.296) 79.057,45.296 79.057,44.677 cw(c76.517,44.677) 78.314,42.881 78.214,42.781 ccw(c80.01,40.985) 77.47,40.985 77.47,40.005 ccw(c78.232,40.005) 78.232,39.243 R305.2@78.471,39.243
NetC211_2: C211.2 U201.11 X201.1 | length 6.8
  Top Layer w0.2: U201.11@99.065,42.798 99.065,42.274 ccw(c99.543,42.274) 99.084,42.14 ccw(c99.543,42.274) 99.205,41.936 99.45,41.691 cw(c98.858,41.099) 99.695,41.099 99.695,39.774 ccw(c100.345,39.774) 99.885,39.315 99.935,39.265 ; 99.935,39.265 ccw(c100.795,40.126) 100.104,39.124 ccw(c100.795,40.126) X201.1@100.795,38.909 100.795,37.12 C211.2@100.95,36.965
NetC212_2: C212.2 U201.12 X201.3 | length 6.9
  Top Layer w0.2: U201.12@99.565,42.798 99.565,42.618 99.611,42.572 101.454,42.572 cw(c101.454,41.631) 102.395,41.631 102.395,41.109 102.895,40.609 X201.3@102.995,40.609 103.195,40.409 C212.2@104.902,40.409